# Altium PCB KEY.PcbDoc
Units mil, origin at the board's own origin, x right, y up, seen from the top; angles counter-clockwise.
Board outline 590.55 x 787.4 mil, 2 copper layers (Top, Bottom), stack 65.748 mil thick; 4 components, 6 nets, 16 pads, 0 vias.
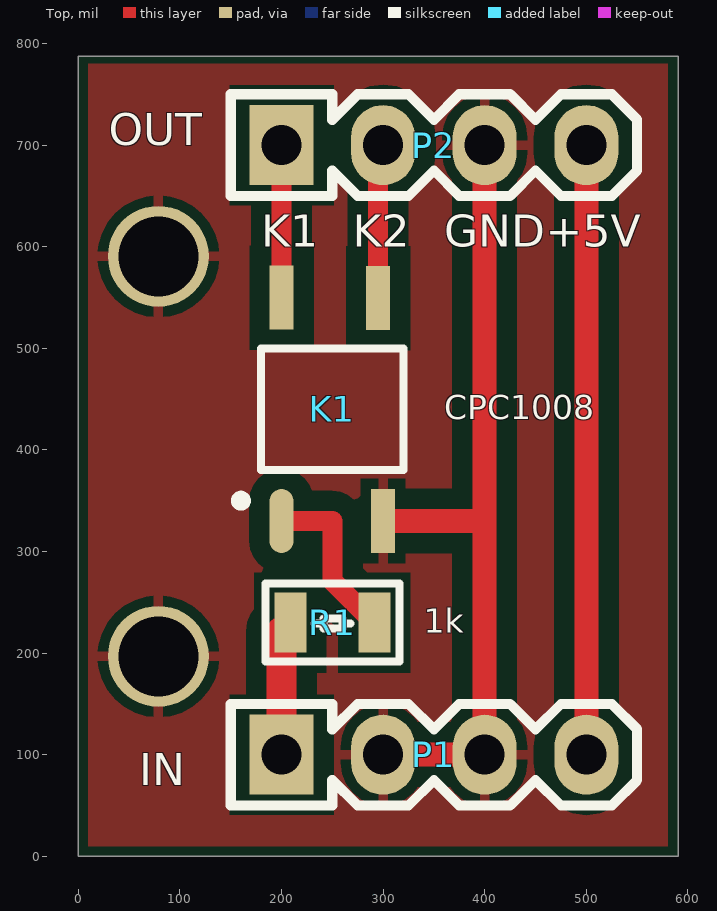
[diagram p0: Top view]
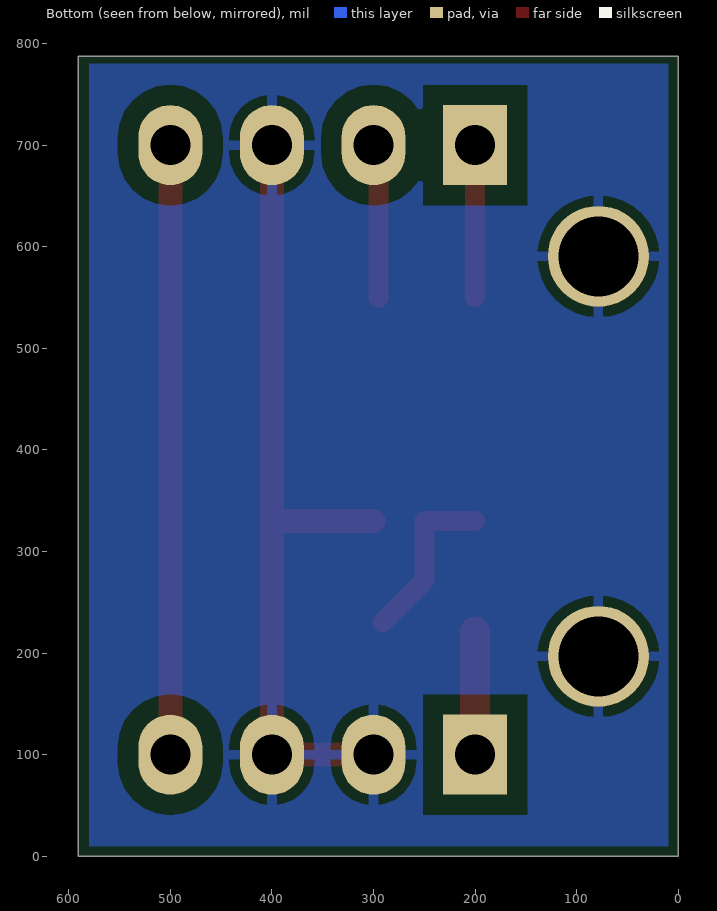
[diagram p1: Bottom view, seen from below]

## Layer stack, top to bottom
Top Solder: solder mask 0.3937, Solder Resist, Dk 3.5
Top: signal copper 1.378
Dielectric 1: dielectric 62.9921, FR-4, Dk 4.8
Bottom: signal copper 1.378
Bottom Solder: solder mask 0.3937, Solder Resist, Dk 3.5

## Board outline
0,0 0,787.4 590.55,787.4 590.55,0

## Design rules (kind name [scope] priority, off if disabled: settings)
Clearance [All] p1: gap=7.87 except(19.68: Arc-Poly Track-Poly SMDPad-Poly THPad-Poly Via-Poly Fill-Poly Poly-Poly)
ComponentClearance DG126 [HasFootprint('DG126') vs HasFootprint('DG126')] p1: gap=-39.37 collisioncheckmode=3 verticalgap=7.87 showdistances=FALSE
ComponentClearance [All] p2: gap=11.81 collisioncheckmode=3 verticalgap=7.87 showdistances=FALSE
HoleSize [All] p1: absolutevalues=TRUE maxlimit=248.03 minlimit=7.87 maxpercent=80.000 minpercent=20.000
HoleToHoleClearance [All] p1: gap=15.75 allowstackedmicrovias=TRUE
MinimumSolderMaskSliver [All] p1: minsoldermaskwidth=3.94
PlaneConnect Via_Plane_Connect [(ObjectKind = 'Via')] p1: planeconnectstyle=Direct reliefexpansion=20 reliefentries=4 reliefconductorwidth=10 reliefairgap=10
PlaneConnect [All] p2: planeconnectstyle=Relief reliefexpansion=20 reliefentries=4 reliefconductorwidth=10 reliefairgap=10
PolygonConnect Via_Poly_Connect [(ObjectKind = 'Via')] p1: connectstyle=Direct reliefconductorwidth=10 reliefentries=4 polygonreliefangle="90 Angle" airgapwidth=10
PolygonConnect [All] p2: connectstyle=Relief reliefconductorwidth=10 reliefentries=4 polygonreliefangle="90 Angle" airgapwidth=10
RoomDefinition KEY [InComponentClass('KEY')] p1: confinementstyle=ConfineIn formatcopy=TRUE lockcomponents=FALSE outline -2300,-7690 -300,-7690 -300,-6690 -2300,-6690
RoutingVias [All] p1: holewidth=11.81 width=23.62 viastyle="Through Hole" minholewidth=11.81 minwidth=23.62 maxholewidth=11.81 maxwidth=23.62
SMDNeckDown [All] p1: percent=50.000
SilkToSilkClearance [All] p1: silktosilkclearance=3.94
SilkToSolderMaskClearance [IsPad] p1: minsilkscreentomaskgap=3.94 clearancetoexposedcopper=TRUE
SolderMaskExpansion [All] p1: expansion=4
Width [All] p1 off: maxlimit=10 minlimit=10 preferedwidth=10
23 further rules are at their usual default settings.

## Components (designator, comment, footprint, x,y, rotation, side; value= is the part's Value field where it differs from the comment)
K1 "CPC1008" SOIC4 270,440 r90 top
P1 "in" "Header 4" 350,100 r0 top
P2 "out" "Header 4" 350,700 r0 top
R1 "1k" RES_0805 250,230 r0 top

## Footprints (in the part's own frame and the unit in brackets; to place one, negate y for a bottom-side part, rotate by r counter-clockwise, add the part's x,y. Pads: shape width x height; smd on the part's side, far side on the other; paste and mask are expansions set on the pad)
"Header 4" [mm]
  rect 1.6x2 hole 1: 1(-3.81,0)
  oval 1.6x2 hole 1: 2(-1.27,0) 3(1.27,0) 4(3.81,0)
  silkscreen extent -5.08,-1.27 5.08,1.27, body extent -4.95,-1.27 5.21,1.23, height 8.2
RES_0805 [mm] "SMD Resistor 0805"
  rect 0.8x1.5 smd: 1(-1.05,0) 2(1.05,0)
  silkscreen extent -1.68,-0.98 1.68,0.97, body extent -1.05,-0.65 1.05,0.65, height 0.5
SOIC4 [mm]
  oval 1.6x0.6 smd: 1(-2.794,1.778)
  rect 1.6x0.6 smd: 2(-2.794,-0.762) 3(2.781,-0.635) 4(2.794,1.778)
  silkscreen extent -2.41,-1.27 1.52,2.92

## Part data
K1: "SSRelay"
P1 P2: library part "Header 4"
R1: library part Resistor

## Free pads (board coordinates)
  round 99.37 hole 78.74: 0(78.74,196.85) 0(78.74,590.55)

## Nets (pads, with @x,y where several pads share a name; then routed paths per layer and width w, separated by ;. In a path a pad name is that pad's centre, name@x,y a point inside that pad or via, vN(x,y) a via of type N, cw(c..) or ccw(c..) an arc to the next point about the centre after c; other vN are vias at no path point)
+5V: P1.4 P2.4 | length 600
  Top w23.62: P1.4 P2.4
GND: K1.2 P1.2 P1.3 P2.3 pad.0 | length 800
  Top w23.62: P1.2 P1.3 400,330 ; K1.2 400,330 ; P2.3 400,330
NetK1_1: K1.1 R1.2 | length 167.1
  Top w19.68: K1.1 250,330 250,271.34 R1.2
NetK1_3: K1.3 P2.2 | length 145.5
  Top w19.68: K1.3 P2.2@295,695
NetK1_4: K1.4 P2.1 | length 150
  Top w19.68: K1.4 P2.1
NetP1_1: P1.1 R1.1 | length 121.3
  Top w29.53: P1.1 R1.1@200,221.34

## Polygon pours and split planes (outlines as drawn)
GND on Bottom "Mechanical 1-No Net" (solid, pour order 3): 10,780 580,780 580,10 10,10
GND on Top "Mechanical 1-No Net" (solid, pour order 6): 10,780 580,780 580,10 10,10

## Silkscreen, mask and mechanical layers (free items; w line width, h text height)
Top Overlay:
  text "OUT" at 30,700 h31.5
  text "K1" at 180,600 h31.5
  text "K2" at 270,600 h31.5
  text "GND" at 360,600 h31.5
  text "+5V" at 460,600 h31.5
  text "IN" at 60,70 h31.5
Outline:
  the board outline again, w10